# EAGLE board JackPotSpanner (EAGLE 9.6.2)
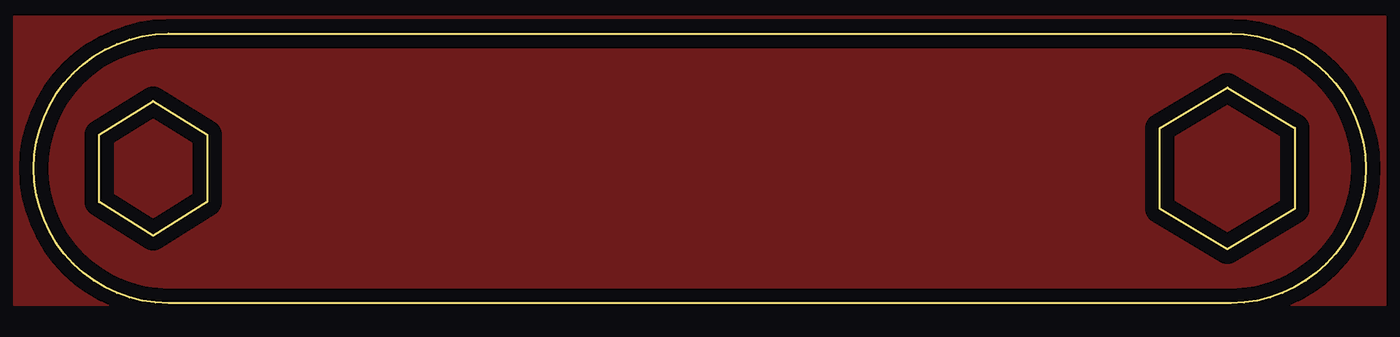
[diagram p0: board, top side]
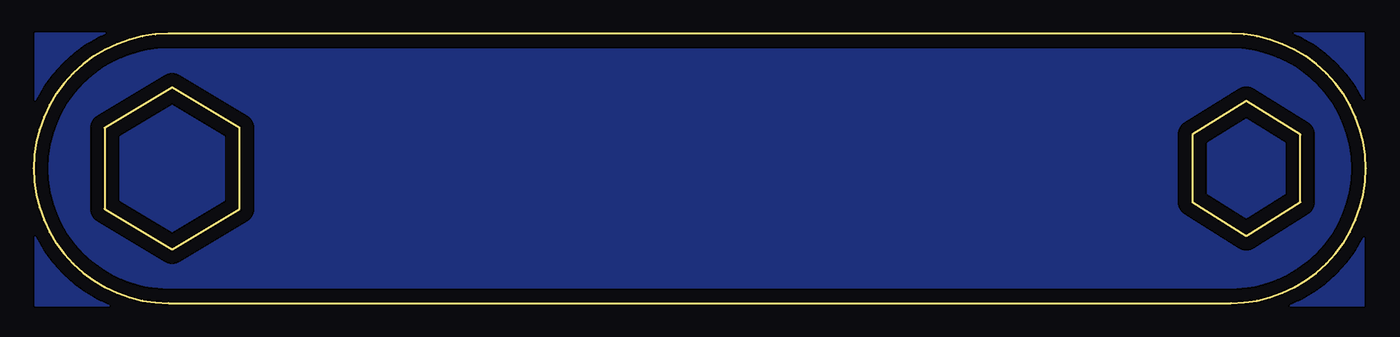
[diagram p1: board, bottom side, seen from below]

Size 98.74 x 20 mm. Coordinates in mm from the lower left corner, seen from the top.
Outline: 10,20 88.74,20 arc-180 88.74,0 10,0 arc-180 10,20
Outline: 88.49,16 93.49,13 93.49,7 88.49,4 83.49,7 83.49,13 88.49,16
Outline: 8.84,15 12.84,12.5 12.84,7.5 8.84,5 4.84,7.5 4.84,12.5 8.84,15
Copper layers (1*16): Top 0.035mm / dielectric 1.5mm / Bottom 0.035mm
Design rules "default": minimum track width 6mil, minimum drill 0.35mm, track to track 6mil, track to pad 6mil, pad to pad 6mil, via to via 6mil, smd to smd 6mil, copper to edge 40mil, drill to drill 6mil, minimum pad ring 10mil, minimum via ring 8mil, stop-mask expansion 4mil, vias tented up to drill 0mil, thermal gap 10mil

## Placement (x,y rotation side)
U$1  [GMSN!_LOGO_TSTOP]  49.37,10 0 top
U$2  [GMSN!_LOGO_TSTOP]  49.37,10 0 bottom

## Library data of the parts
U$1 U$2 = GMSN

## Tracks (layer width: path | path; a pad name or v marks a point on that pad's centre or on a via)
GND
  pour Top: 100.17,21.3 100.17,-0.16 -1.43,-0.16 -1.43,21.3
  pour Bottom: 98.62,20.01 98.62,-0.16 0.14,-0.16 0.14,20.01